# EAGLE board mapleCUx_med_021 (EAGLE 7.3.0)

Size 82.66 x 50.1 mm. Coordinates in mm from the lower left corner, seen from the top.
Outline: 61.8,6.76 arc90 58.5,3.46 58.5,0.14 24.27,0.14 24.27,3.46 arc90 20.97,6.76 20.94,6.76 arc90 17.64,3.46 17.64,0.14 0.56,0.14 0.06,0.14 0.06,0 0.06,47 arc-90 0.56,48.13 82.16,48.13 arc-90 82.66,47.63 82.66,0.64 arc-90 82.16,0.14 65.13,0.14 65.13,3.46 arc90 61.83,6.76
Outline: 21.17,50.1 21.14,50.1
Outline: 62.03,50.1 62,50.1
Copper layers (1*16): Top 0.035mm / dielectric 1.5mm / Bottom 0.035mm
Design rules "SeeedStudio_2layer_DRU_no_angle_20140221": minimum track width 6mil, minimum drill 12mil, track to track 6mil, track to pad 6mil, pad to pad 6mil, via to via 6mil, smd to smd 0mil, copper to edge 10mil, drill to drill 10mil, minimum pad ring 10mil, minimum via ring 6mil, stop-mask expansion 2mil, vias tented up to drill 100mil, thermal gap 10mil
Net classes: 0 default: width 0.305 mm; 1 PWR: width 0.457 mm
Holes 3.2 mm at 14.39,14.46 14.39,42.46 68.39,42.46 68.39,14.46
tRestrict: area 17.3,-0.1 to 24.2,6.7; area 58.5,-0.1 to 65.3,6.7; 1 lines
bRestrict: area 17.3,-0.1 to 24.2,6.7; area 58.5,-0.1 to 65.3,6.7; 1 lines

## Footprints (pad centres in the part's own frame; a part is rotated, then mirrored left to right if it is on the bottom)
P1-13 = drill 1.321 pad 2.159 octagon: TP 0,0
C0805 = smd 1.3 x 1.5: 1 -0.95,0; 2 0.95,0
C1210 = smd 1.6 x 2.7: 1 -1.4,0; 2 1.4,0
CC1101_MODULE1_SMD = smd 1.93 x 0.813: ANT 19,5.96; CSN 0,0; GDO0 0,2; GDO2 0,4; GND@0 0,12; GND@1 19,8.5; GND@2 19,3.42; MISO 0,6; MOSI 0,10; SCLK 0,8; VCC 0,14
CC1101_MODULE3_DIL = drill 1.016 octagon: CSN 1.81,6.1; GDO0 4.35,6.1; GDO2 4.35,8.64; GND@0 1.81,3.56; GND@1 4.35,3.56; MISO 1.81,8.64; MOSI 1.81,11.18; SCK 4.35,11.18; VCC@0 1.81,13.72; VCC@1 4.35,13.72
MA04-1 = drill 1.016 long: 1 -3.81,0; 2 -1.27,0; 3 1.27,0; 4 3.81,0
HM-MOD-UART-DIL = drill 0.8 offset: 1 0,12; 2 0,10; 3 0,8; 4 0,6; 5 0,4; 6 0,2
TQFP32-08 = smd 1.27 x 0.559: 1 -4.293,2.8; 2 -4.293,2; 3 -4.293,1.2; 4 -4.293,0.4; 5 -4.293,-0.4; 6 -4.293,-1.2; 7 -4.293,-2; 8 -4.293,-2.8; 17 4.293,-2.8; 18 4.293,-2; 19 4.293,-1.2; 20 4.293,-0.4; 21 4.293,0.4; 22 4.293,1.2; 23 4.293,2; 24 4.293,2.8 | smd 0.559 x 1.27: 9 -2.8,-4.293; 10 -2,-4.293; 11 -1.2,-4.293; 12 -0.4,-4.293; 13 0.4,-4.293; 14 1.2,-4.293; 15 2,-4.293; 16 2.8,-4.293; 25 2.8,4.293; 26 2,4.293; 27 1.2,4.293; 28 0.4,4.293; 29 -0.4,4.293; 30 -1.2,4.293; 31 -2,4.293; 32 -2.8,4.293
CHIPLED_0805 = smd 1.2 x 1.2: A 0,-1.05; C 0,1.05
NRF24L01+SMD = smd 0.635 x 1.524: CE -1.575,-7.861; CSN -0.305,-7.861; GND -2.845,-7.861; IRQ 4.775,-7.861; MISO 3.505,-7.861; MOSI 2.235,-7.861; SCK 0.965,-7.861; VCC -4.115,-7.861
R0805 = smd 1.3 x 1.5: 1 -0.95,0; 2 0.95,0
20-DIP = drill 1.016 pad 1.27 long: 1 -24.13,-7.62; 2 -21.59,-7.62; 3 -19.05,-7.62; 4 -16.51,-7.62; 5 -13.97,-7.62; 6 -11.43,-7.62; 7 -8.89,-7.62; 8 -6.35,-7.62; 9 -3.81,-7.62; 10 -1.27,-7.62; 11 1.27,-7.62; 12 3.81,-7.62; 13 6.35,-7.62; 14 8.89,-7.62; 15 11.43,-7.62; 16 13.97,-7.62; 17 16.51,-7.62; 18 19.05,-7.62; 19 21.59,-7.62; 20 24.13,-7.62 | drill 1 pad 1.27 long: 21 24.13,7.62; 22 21.59,7.62; 23 19.05,7.62; 24 16.51,7.62; 25 13.97,7.62; 26 11.43,7.62; 27 8.89,7.62; 28 6.35,7.62; 29 3.81,7.62; 30 1.27,7.62; 31 -1.27,7.62; 32 -3.81,7.62; 33 -6.35,7.62; 34 -8.89,7.62; 35 -11.43,7.62; 36 -13.97,7.62; 37 -16.51,7.62; 38 -19.05,7.62; 39 -21.59,7.62; 40 -24.13,7.62
SMA_EDGELAUNCH_UFL = smd 4.064 x 1.524: GND@1 2.032,-2.54; GND@2 2.032,2.54 | smd 4.064 x 1.524 bottom: GND@3 2.032,2.54; GND@4 2.032,-2.54 | smd 2.032 x 1.016: P 3.048,0
2X03-1.27MM_SMD = smd 0.75 x 2.8: P$1 -1.27,-1.905; P$2 -1.27,1.905; P$3 0,-1.905; P$4 0,1.905; P$5 1.27,-1.905; P$6 1.27,1.905

## Placement (x,y rotation side)
ANT2  TPPAD1-13  [P1-13]  21.01,9.66 0 top
ANT3  TPPAD1-13  [P1-13]  50.84,8.33 0 top
C1  22pF  [C0805]  28.89,21.09 90 bottom
C2  22pF  [C0805]  79.69,31 180 bottom
C3  22pF  [C0805]  28.51,35.95 90 top
C4  22pF  [C0805]  49.46,15.12 90 top
C5  10uF  [C1210]  37.65,42.43 270 top
C6  22pF  [C0805]  14.44,45.62 0 top
C7  4,7uF  [C1210]  79.43,26.17 0 bottom
C31  100n  [C0805]  14.49,7.55 0 bottom
C32  100n  [C0805]  14.66,10.29 180 bottom
CC0  CC1101  [CC1101_MODULE1_SMD]  25.09,37.88 180 top
CC1  CC1101_MODULE1SMD  [CC1101_MODULE1_SMD]  25.06,19.14 0 bottom
CC2  CC1101_MODULE1SMD  [CC1101_MODULE1_SMD]  44.36,2.04 0 bottom
CC2-EXT  CC1101_MODULE3_DIL  [CC1101_MODULE3_DIL]  52.22,0.14 0 top
CC3  CC1101_MODULE1SMD  [CC1101_MODULE1_SMD]  29.45,1.99 0 top
DBG  [MA04-1]  76,45.42 0 top
HMMOD-UART  HM-MOD-UARTDIL  [HM-MOD-UART-DIL]  30.92,45.25 270 bottom
IC31  ATMEGA168-TQFP  [TQFP32-08]  6.59,10.9 270 bottom
LED32  [CHIPLED_0805]  1.96,45.22 180 top
MYSENS  NRF24L01+SMD  [NRF24L01+SMD]  6.41,10.49 180 top
R32  1k  [R0805]  5.77,44.59 90 top
R34  [R0805]  18.47,14.74 270 bottom
U$4  MAPLEMINI  [20-DIP]  57.17,28.78 0 bottom
UART0  [MA04-1]  60.38,45.22 180 top
UART1  [MA04-1]  48.95,45.22 180 top
X1  [SMA_EDGELAUNCH_UFL]  0.06,23.14 180 bottom
X5  [SMA_EDGELAUNCH_UFL]  0.06,34.13 0 top
X31  M03X2  [2X03-1.27MM_SMD]  14.66,8.39 0 top

## Library data of the parts
ANT2 ANT3 = testpad
C1-C7 C31 C32 R32 R34 = rcl
CC0 CC1 CC2 CC2-EXT CC3 HMMOD-UART MYSENS = wireless
DBG UART0 UART1 = con-lstb; OC_FARNELL: unknown; OC_NEWARK: unknown
IC31 = atmel
LED32 = led
U$4 = maplemini-mall
X1 X5 = adafruit
X31 = mechanics

## Nets
+5V: U$4.21
CC_CS0: CC0.CSN U$4.29
CC_CS1: CC1.CSN U$4.35
CC_CS2: CC2-EXT.CSN CC2.CSN U$4.4
CC_CS3: CC3.CSN U$4.25
CC_IN_0: CC0.GDO2 U$4.33
CC_IN_1: CC1.GDO2 U$4.7
CC_IN_2: CC2-EXT.GDO2 CC2.GDO2 U$4.5
CC_IN_3: CC3.GDO2 U$4.37
CC_OUT_0: CC0.GDO0 U$4.32
CC_OUT_1: CC1.GDO0 U$4.6
CC_OUT_2: CC2-EXT.GDO0 CC2.GDO0 U$4.36
CE-A: IC31.13 MYSENS.CE
CSN-A: IC31.14 MYSENS.CSN
GND [PWR]: C1.1 C2.1 C3.1 C4.1 C5.2 C6.2 C7.2 C31.2 C32.2 CC0.GND@0 CC0.GND@1 CC0.GND@2 CC1.GND@0 CC1.GND@1 CC1.GND@2 CC2-EXT.GND@0 CC2-EXT.GND@1 CC2.GND@0 CC2.GND@1 CC2.GND@2 CC3.GND@0 CC3.GND@1 CC3.GND@2 DBG.4 HMMOD-UART.2 IC31.3 IC31.5 IC31.21 LED32.C MYSENS.GND U$4.2 U$4.24 U$4.39 UART0.4 UART1.4 X1.GND@1 X1.GND@2 X1.GND@3 X1.GND@4 X5.GND@1 X5.GND@2 X5.GND@3 X5.GND@4 X31.P$6
IRQ-A: IC31.32 MYSENS.IRQ
M-RES: IC31.29 R34.2 X31.P$5
M-SCK: IC31.17 MYSENS.SCK X31.P$3
MISO1: CC0.MISO CC1.MISO CC2-EXT.MISO CC2.MISO CC3.MISO U$4.27
MISO2: U$4.18
MISO-A: IC31.16 MYSENS.MISO X31.P$1
MOSI1: CC0.MOSI CC1.MOSI CC2-EXT.MOSI CC2.MOSI CC3.MOSI U$4.26
MOSI-A: IC31.15 MYSENS.MOSI X31.P$4
N$1: CC1.ANT X1.P
N$2: ANT3.TP CC3.ANT
N$3: ANT2.TP CC2.ANT
N$4: CC0.ANT X5.P
N$5: LED32.A R32.2
N$15: C32.1 IC31.20
NRESET: U$4.34
RST: U$4.17
RX1: U$4.22 UART1.3
RX-MAPLE: HMMOD-UART.5 IC31.31 U$4.30 UART0.3
RX_DBG: DBG.3 U$4.14
RX_LED: IC31.2 R32.1
SCK1: CC0.SCLK CC1.SCLK CC2-EXT.SCK CC2.SCLK CC3.SCLK U$4.28
SCK2: U$4.19
SWCLK/TCK: U$4.10
SWDIO/TMS: U$4.11
SWO/TDO: U$4.8
TDI: U$4.9
TX1: U$4.23 UART1.2
TX-MAPLE: HMMOD-UART.6 IC31.30 U$4.31 UART0.2
TX_DBG: DBG.2 U$4.15
VCC [PWR]: C1.2 C2.2 C3.2 C4.2 C5.1 C6.1 C7.1 C31.1 CC0.VCC CC1.VCC CC2-EXT.VCC@0 CC2-EXT.VCC@1 CC2.VCC CC3.VCC DBG.1 HMMOD-UART.1 IC31.4 IC31.6 IC31.18 MYSENS.VCC R34.1 U$4.1 U$4.40 UART0.1 UART1.1 X31.P$2
WIZ_CS: U$4.20
WIZ_RST: U$4.16

## Tracks (layer width: path | path; a pad name or v marks a point on that pad's centre or on a via)
CC_CS0  (1 unrouted)
CC_CS1  (1 unrouted)
CC_CS2  (2 unrouted)
CC_CS3  (1 unrouted)
CC_IN_0  (1 unrouted)
CC_IN_1  (1 unrouted)
CC_IN_2  (2 unrouted)
CC_IN_3  (1 unrouted)
CC_OUT_0  (1 unrouted)
CC_OUT_1  (1 unrouted)
CC_OUT_2  (2 unrouted)
CE-A  (1 unrouted)
CSN-A  (1 unrouted)
GND  (43 unrouted)
IRQ-A  (1 unrouted)
M-RES  (2 unrouted)
M-SCK  (2 unrouted)
MISO1  (5 unrouted)
MISO-A  (2 unrouted)
MOSI1  (5 unrouted)
MOSI-A  (2 unrouted)
N$1  (1 unrouted)
N$2  (1 unrouted)
N$3  (1 unrouted)
N$4  (1 unrouted)
N$5  (1 unrouted)
N$15  (1 unrouted)
RX1  (1 unrouted)
RX-MAPLE  (3 unrouted)
RX_DBG  (1 unrouted)
RX_LED  (1 unrouted)
SCK1  (5 unrouted)
TX1  (1 unrouted)
TX-MAPLE  (3 unrouted)
TX_DBG  (1 unrouted)
VCC  (25 unrouted)